# Altium PCB cs42448_breakout.PcbDoc
Units mil, origin at the board's own origin, x right, y up, seen from the top; angles counter-clockwise.
Board outline 2300 x 2400 mil, 2 copper layers (Top Layer, Bottom Layer); 69 components, 48 nets, 216 pads, 25 vias.
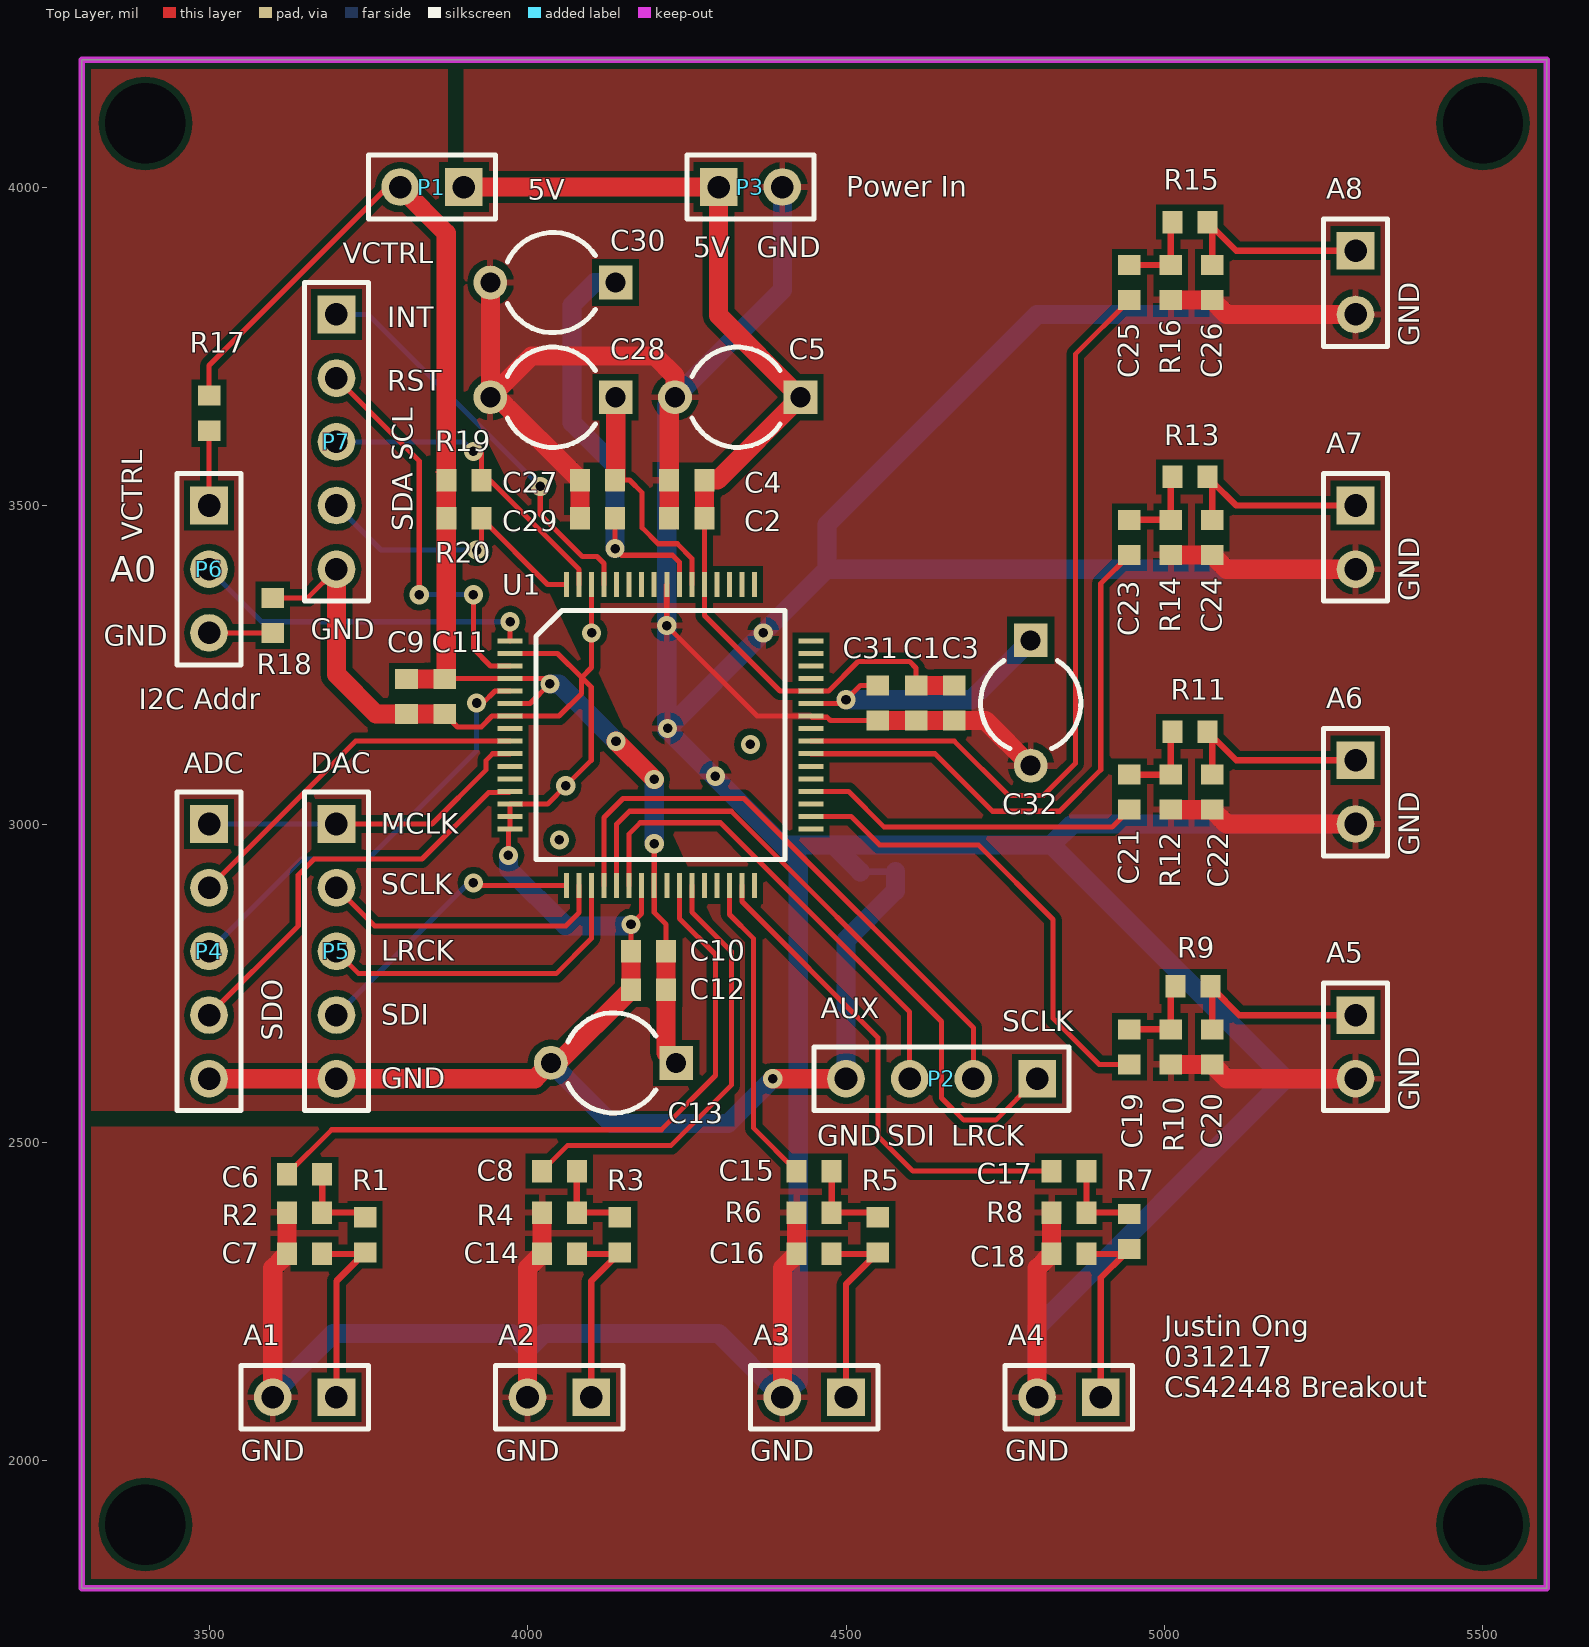
[diagram p0: Top Layer view]
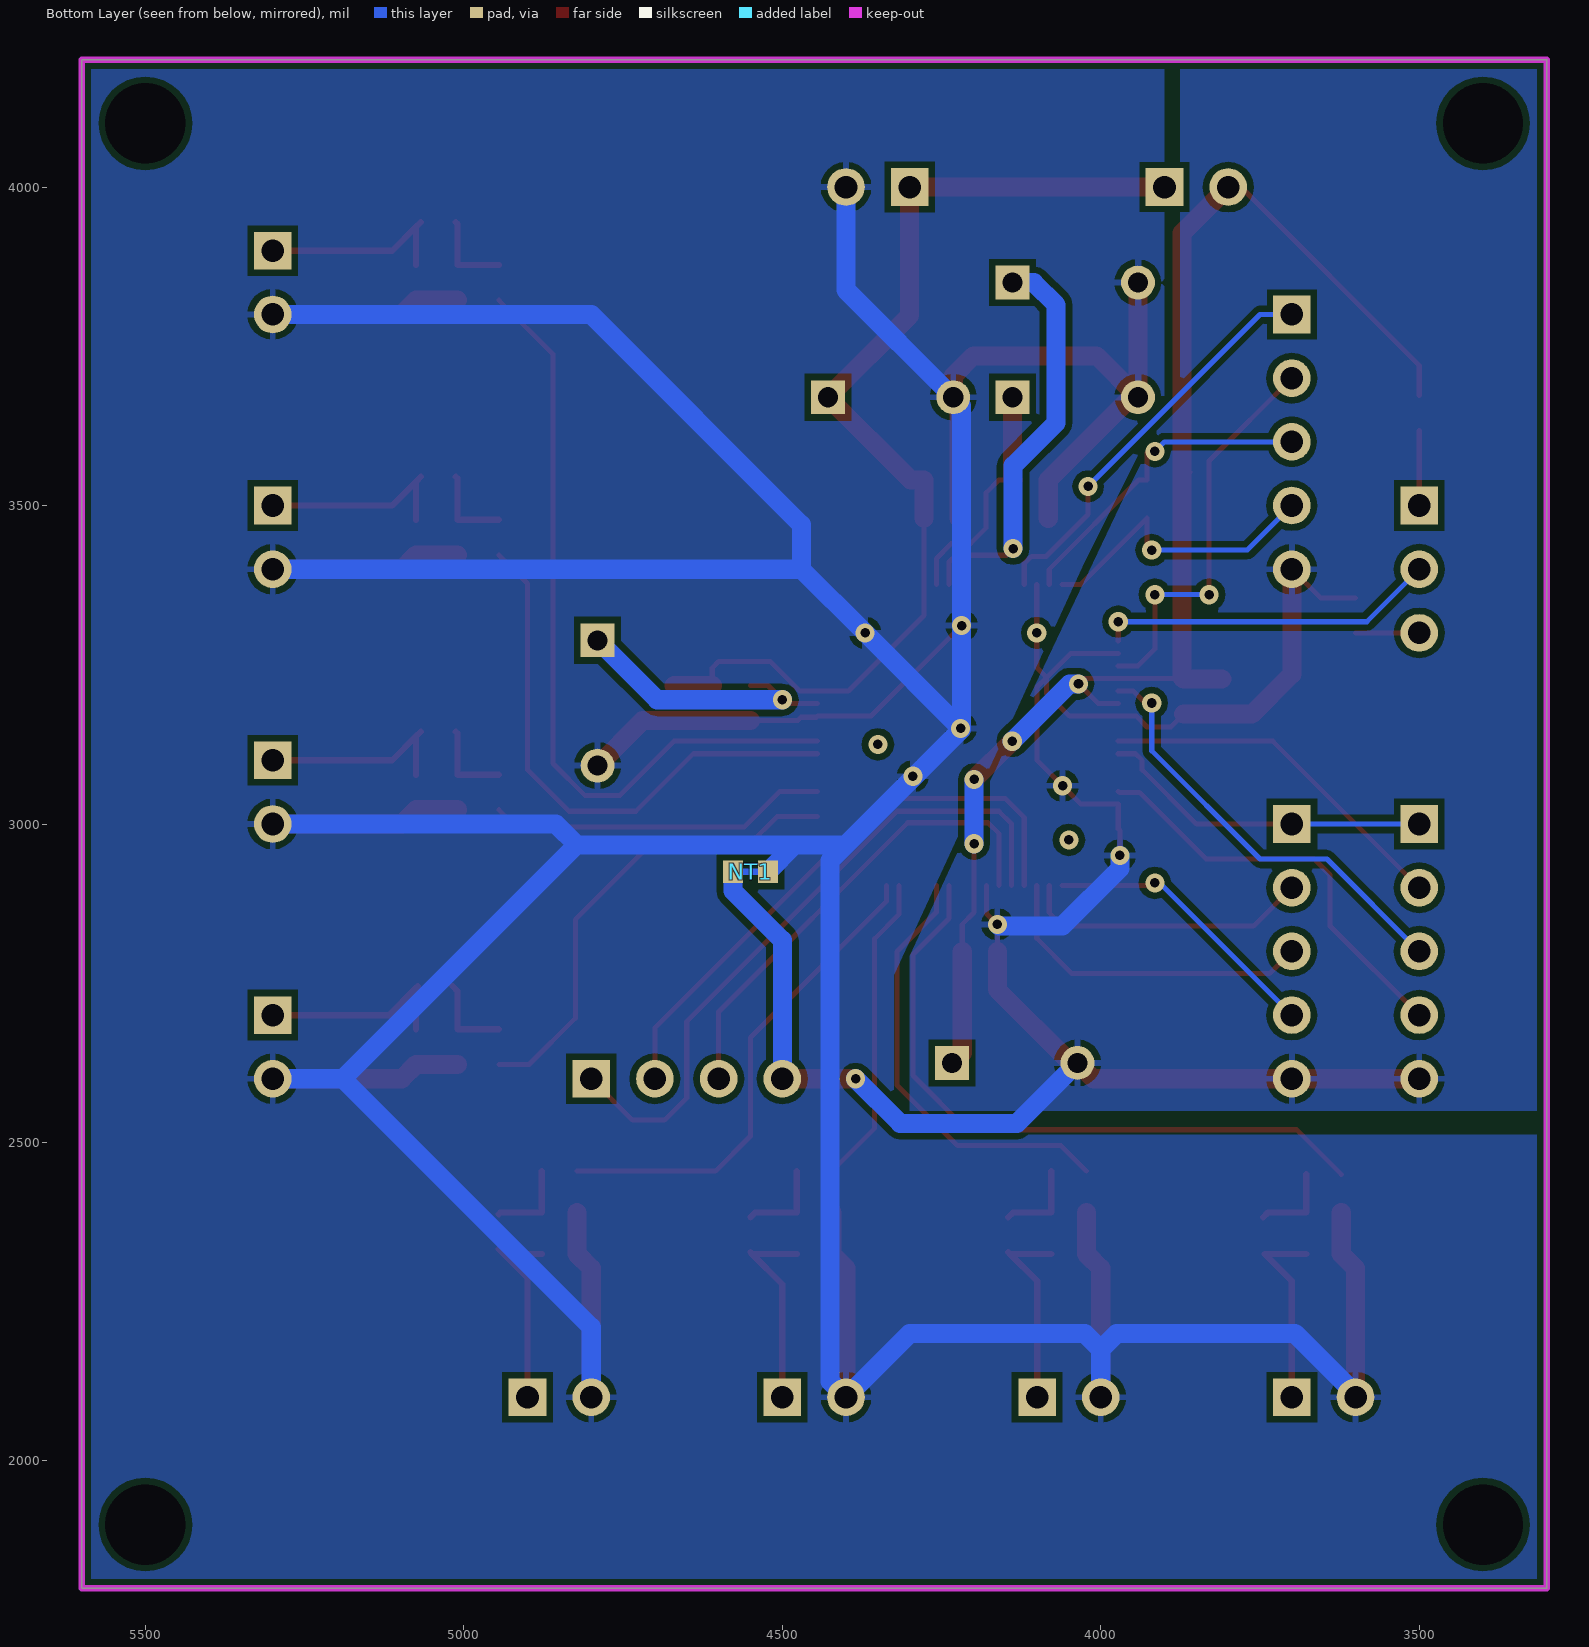
[diagram p1: Bottom Layer view, seen from below]

## Layer stack, top to bottom
Top Solder: solder mask 0.4, Solder Resist, Dk 3.5
Top Layer: signal copper 1.4
Dielectric 1: dielectric 12.6, FR-4, Dk 4.8
Bottom Layer: signal copper 1.4
Bottom Solder: solder mask 0.4, Solder Resist, Dk 3.5

## Board outline
3300,1800 3300,4200 5600,4200 5600,1800

## Design rules (kind name [scope] priority, off if disabled: settings)
Clearance [All] p1: gap=10
PolygonConnect [All] p1: connectstyle=Relief reliefconductorwidth=10 reliefentries=4 polygonreliefangle="90 Angle" airgapwidth=10
RoutingVias [All] p1: holewidth=20 width=20 viastyle="Through Hole" minholewidth=12 minwidth=20 maxholewidth=28 maxwidth=30
SolderMaskExpansion [All] p1: expansion=4
Width [All] p1: maxlimit=30 minlimit=6 preferedwidth=10
30 further rules are at their usual default settings.

## Components (designator, comment, footprint, x,y, rotation, side; value= is the part's Value field where it differs from the comment)
A1 "Header 2" HDR1X2 3700,2100 r180 top
A2 "Header 2" HDR1X2 4100,2100 r180 top
A3 "Header 2" HDR1X2 4500,2100 r180 top
A4 "Header 2" HDR1X2 4900,2100 r180 top
A5 "Header 2" HDR1X2 5300,2700 r270 top
A6 "Header 2" HDR1X2 5300,3100 r270 top
A7 "Header 2" HDR1X2 5300,3500 r270 top
A8 "Header 2" HDR1X2 5300,3900 r270 top
C1 "Cap" 1608[0603] 4610,3190 r90 top
C2 "Cap" 1608[0603] 4250,3480 r0 top
C3 "Cap" 1608[0603] 4670,3190 r90 top
C4 "Cap" 1608[0603] 4250,3540 r0 top
C5 "Cap Pol1" CAPR5-4X5 4330,3670 r180 top
C6 "Cap" 1608[0603] 3650,2450 r180 top
C7 "Cap" 1608[0603] 3650,2325 r0 top
C8 "Cap" 1608[0603] 4050,2455 r180 top
C9 "Cap" 1608[0603] 3810,3200 r90 top
C10 "Cap" 1608[0603] 4190,2800 r0 top
C11 "Cap" 1608[0603] 3870,3200 r90 top
C12 "Cap" 1608[0603] 4190,2740 r0 top
C13 "Cap Pol1" CAPR5-4X5 4135,2625 r180 top
C14 "Cap" 1608[0603] 4050,2325 r0 top
C15 "Cap" 1608[0603] 4450,2455 r180 top
C16 "Cap" 1608[0603] 4450,2325 r0 top
C17 "Cap" 1608[0603] 4850,2455 r180 top
C18 "Cap" 1608[0603] 4850,2325 r0 top
C19 "Cap" 1608[0603] 4945,2650 r270 top
C20 "Cap" 1608[0603] 5075,2650 r90 top
C21 "Cap" 1608[0603] 4945,3050 r270 top
C22 "Cap" 1608[0603] 5075,3050 r90 top
C23 "Cap" 1608[0603] 4945,3450 r270 top
C24 "Cap" 1608[0603] 5075,3450 r90 top
C25 "Cap" 1608[0603] 4945,3850 r270 top
C26 "Cap" 1608[0603] 5075,3850 r90 top
C27 "Cap" 1608[0603] 4110,3540 r0 top
C28 "Cap Pol1" CAPR5-4X5 4040,3670 r180 top
C29 "Cap" 1608[0603] 4110,3480 r0 top
C30 "Cap Pol1" CAPR5-4X5 4040,3850 r180 top
C31 "Cap" 1608[0603] 4550,3190 r90 top
C32 "Cap Pol1" CAPR5-4X5 4790,3190 r270 top
NT1 "Net Tie" "1608[0603] Net Tie" 4550,2925 r180 bottom net-tie
P1 "Control Voltage" HDR1X2 3900,4000 r180 top
P2 "AUX Bus" HDR1X4 4800,2600 r180 top
P3 "Power Input" HDR1X2 4300,4000 r0 top
P4 "ADC Bus" HDR1X5 3500,3000 r270 top
P5 "DAC Bus" HDR1X5 3700,3000 r270 top
P6 "I2C Address" HDR1X3 3500,3500 r270 top
P7 "Control Bus" HDR1X5 3700,3800 r270 top
R1 "Res2" 1608[0603] 3745,2355 r90 top
R2 "Res2" 1608[0603] 3650,2390 r180 top
R3 "Res2" 1608[0603] 4145,2355 r90 top
R4 "Res2" 1608[0603] 4050,2390 r180 top
R5 "Res2" 1608[0603] 4550,2355 r90 top
R6 "Res2" 1608[0603] 4450,2390 r180 top
R7 "Res2" 1608[0603] 4945,2360 r90 top
R8 "Res2" 1608[0603] 4850,2390 r180 top
R9 "Res2" 1608[0603] 5045,2745 r180 top
R10 "Res2" 1608[0603] 5010,2650 r270 top
R11 "Res2" 1608[0603] 5040,3145 r180 top
R12 "Res2" 1608[0603] 5010,3050 r270 top
R13 "Res2" 1608[0603] 5040,3545 r180 top
R14 "Res2" 1608[0603] 5010,3450 r270 top
R15 "Res2" 1608[0603] 5040,3945 r180 top
R16 "Res2" 1608[0603] 5010,3850 r270 top
R17 "Res2" 1608[0603] 3500,3645 r270 top
R18 "Res2" 1608[0603] 3600,3327.56 r90 top
R19 "Res2" 1608[0603] 3900,3540 r0 top
R20 "Res2" 1608[0603] 3900,3480 r0 top
U1 "CS42448" 64L-LQFP 3972.56,3287.48 r0 top locked

## Footprints (in the part's own frame and the unit in brackets; to place one, negate y for a bottom-side part, rotate by r counter-clockwise, add the part's x,y. Pads: shape width x height; smd on the part's side, far side on the other; paste and mask are expansions set on the pad)
64L-LQFP [mm]
  rect 1x0.2 smd: 1(0,0) 2(0,-0.5) 3(0,-1) 4(0,-1.5) 5(0,-2) 6(0,-2.5) 7(0,-3) 8(0,-3.5) 9(0,-4) 10(0,-4.5) 11(0,-5) 12(0,-5.5) 13(0,-6) 14(0,-6.5) 15(0,-7) 16(0,-7.5) 33(12,-7.5) 34(12,-7) 35(12,-6.5) 36(12,-6) 37(12,-5.5) 38(12,-5) 39(12,-4.5) 40(12,-4) 41(12,-3.5) 42(12,-3) 43(12,-2.5) 44(12,-2) 45(12,-1.5) 46(12,-1) 47(12,-0.5) 48(12,0)
  rect 0.2x1 smd: 17(2.25,-9.75) 18(2.75,-9.75) 19(3.25,-9.75) 20(3.75,-9.75) 21(4.25,-9.75) 22(4.75,-9.75) 23(5.25,-9.75) 24(5.75,-9.75) 25(6.25,-9.75) 26(6.75,-9.75) 27(7.25,-9.75) 28(7.75,-9.75) 29(8.25,-9.75) 30(8.75,-9.75) 31(9.25,-9.75) 32(9.75,-9.75) 49(9.75,2.25) 50(9.25,2.25) 51(8.75,2.25) 52(8.25,2.25) 53(7.75,2.25) 54(7.25,2.25) 55(6.75,2.25) 56(6.25,2.25) 57(5.75,2.25) 58(5.25,2.25) 59(4.75,2.25) 60(4.25,2.25) 61(3.75,2.25) 62(3.25,2.25) 63(2.75,2.25) 64(2.25,2.25)
  silkscreen extent 1.03,-8.71 10.96,1.22
1608[0603] [mm] "Chip Capacitor, Body 1.6x0.8mm, IPC High Density"
  rect 0.8x0.9 smd: 1(-0.7,0) 2(0.7,0)
  body extent -0.87,-0.48 0.87,0.48, height 1.3
"1608[0603] Net Tie" [mm] "Chip Capacitor, Body 1.6x0.8mm, IPC High Density"
  rect 0.8x0.9 smd: 1(-0.7,0) 2(0.7,0)
  Top Layer lines w0.254: 0.7,0 -0.7,0
  body extent -0.87,-0.48 0.87,0.48, height 1.3
CAPR5-4X5 [mm] "Capacitor; 2 Leads"
  rect 1.35x1.35 hole 0.8: 1(-2.5,0)
  round 1.35 hole 0.8: 2(2.5,0)
  silkscreen extent -1.69,-2 1.82,2
HDR1X2 [mm] "Connector; Header; 2 Position"
  rect 1.5x1.5 hole 0.9: 1(0,0)
  round 1.5 hole 0.9: 2(2.54,0)
  silkscreen extent -1.27,-1.27 3.81,1.27
HDR1X3 [mm] "Connector; Header; 3 Position"
  rect 1.5x1.5 hole 0.9: 1(0,0)
  round 1.5 hole 0.9: 2(2.54,0) 3(5.08,0)
  silkscreen extent -1.27,-1.27 6.35,1.27
HDR1X4 [mm] "Connector; Header; 4 Position"
  rect 1.5x1.5 hole 0.9: 1(0,0)
  round 1.5 hole 0.9: 2(2.54,0) 3(5.08,0) 4(7.62,0)
  silkscreen extent -1.27,-1.27 8.89,1.27
HDR1X5 [mm] "Connector; Header; 5 Position"
  rect 1.5x1.5 hole 0.9: 1(0,0)
  round 1.5 hole 0.9: 2(2.54,0) 3(5.08,0) 4(7.62,0) 5(10.16,0)
  silkscreen extent -1.27,-1.27 11.43,1.27

## Part data
A1 A2 A3 A4 A5 A6 A7 A8: "Header, 2-Pin"
C1 C2 C3 C4 C6 C7 C8 C9 C10 C11 C12 C14 C15 C16 C17 C18 C19 C20 C21 C22 C23 C24 C25 C26 C27 C29 C31: "Capacitor"
C5 C13 C28 C30 C32: "Polarized Capacitor (Radial)"
P1 P3: library part "Header 2", "Header, 2-Pin"
P2: library part "Header 4", "Header, 4-Pin"
P4 P5 P7: library part "Header 5", "Header, 5-Pin"
P6: library part "Header 3", "Header, 3-Pin"
R1 R2 R3 R4 R5 R6 R7 R8 R9 R10 R11 R12 R13 R14 R15 R16 R17 R18 R19 R20: "Resistor"
U1: "108 dB, 192 kHz 6-In, 8-Out CODEC"

## Free pads (board coordinates)
  round 0 hole 125.98: M1(3400,4100) M2(5500,4100) M3(5500,1900) M4(3400,1900)

## Via types
v1: diameter 30, hole 15, Top Layer to Bottom Layer, 25 vias

## Nets (pads, with @x,y where several pads share a name; then routed paths per layer and width w, separated by ;. In a path a pad name is that pad's centre, name@x,y a point inside that pad or via, vN(x,y) a via of type N, cw(c..) or ccw(c..) an arc to the next point about the centre after c; other vN are vias at no path point)
5V: C1.2 C2.2 C3.2 C4.2 C5.1 P1.1 P3.1 U1.44 U1.53 | length 1692.8
  Top Layer w8: C2.2 4277.56,3376.18 U1.53 4277.68,3327.32 4396.26,3208.74 U1.44 4472.73,3208.74 4518.99,3255 4600,3255 4610,3245 C1.2
  Top Layer w30: P1.1 P3.1 4300,3798.43 C5.1 4298.43,3540 C4.2 C2.2 ; C1.2 C3.2
ADC_LRCK: P4.3 U1.5 | length 686.2
  Top Layer w8: v1(3920,3190) 3920.44,3189.56 3929.64,3189.56 3948.82,3208.74 U1.5
  Bottom Layer w8: P4.3 3645,2945 3750,2945 3920,3115 v1(3920,3190)
ADC_SCLK: P4.2 U1.9 | length 567.8
  Top Layer w8: P4.2 3730,3130 U1.9
ADC_SDOUT1: P4.4 U1.13 | length 664.9
  Top Layer w8: P4.4 3640,2840 3640,2920 3665,2945 3834.36,2945 3938.94,3049.57 3970.87,3049.57 U1.13
AGND: A1.2 A2.2 A3.2 A4.2 A5.2 A6.2 A7.2 A8.2 C1.1 C2.1 C3.1 C4.1 C5.2 C7.1 C14.1 C16.1 C18.1 C20.1 C22.1 C24.1 C26.1 C27.1 C28.2 C29.1 C30.2 C31.1 C32.2 NT1.2 P3.2 R2.2 R4.2 R6.2 R8.2 R10.2 R12.2 R14.2 R16.2 U1.42 U1.56 | length 11652.3
  Top Layer w8: U1.56 v1(4218.62,3311.38) 4360.63,3169.37 U1.42 4446.75,3167.62 4470.48,3167.62 4475.66,3162.44 C31.1
  Top Layer w30: A1.2 3600,2302.56 C7.1 R2.2 ; C30.2 C28.2 ; A2.2 4000,2302.56 C14.1 R4.2 ; C29.1 C27.1 3952.44,3670 C28.2 ; C2.1 C4.1 4222.44,3660.87 C5.2 4231.57,3703.43 4200,3735 4006.57,3735 C28.2 ; A3.2 4400,2302.56 C16.1 R6.2 ; C31.1 C1.1 C3.1 4719.13,3162.44 C32.2 ; A4.2 4800,2302.56 C18.1 R8.2 ; R10.2 C20.1 5097.44,2600 A5.2 ; R12.2 C22.1 5097.44,3000 A6.2 ; R14.2 C24.1 5097.44,3400 A7.2 ; R16.2 C26.1 5097.44,3800 A8.2
  Bottom Layer w30: A1.2 3600,2105 3695,2200 3975,2200 4000,2175 ; A2.2 4000,2175 ; P3.2 4400,3838.43 C5.2 4218.62,3657.05 v1(4218.62,3311.38) v1@4218.62,3148.62 ; NT1.2 4480.2,2967.24 ; A4.2 4800,2210 5190,2600 ; A5.2 5190,2600 ; A6.2 4855.51,3000 4822.76,2967.24 ; A7.2 4470,3400 ; A8.2 4800,3800 4470,3470 4470,3400 ; 4000,2175 4025,2200 4300,2200 A3.2 4425,2125 4425,2942.24 4400,2967.24 ; v1@4218.62,3148.62 4400,2967.24 ; v1@4218.62,3148.62 v1(4220,3150) v1(4370,3300) 4470,3400 ; 4400,2967.24 4480.2,2967.24 ; 4480.2,2967.24 4822.76,2967.24 ; 4822.76,2967.24 5190,2600
  other v1: 4295,3075
AUX_LRCLK: P2.2 U1.20 | length 927.8
  Top Layer w8: U1.20 4120.2,3010.2 4150,3040 4340,3040 4700,2680 P2.2
AUX_SCLK: P2.1 U1.21 | length 1077.8
  Top Layer w8: U1.21 4139.88,2999.88 4160,3020 4320,3020 4650,2690 4650,2570 4685,2535 4735,2535 P2.1 P2.1@4785,2600
AUX_SDIN: P2.3 U1.22 | length 756.6
  Top Layer w8: U1.22 4159.57,2984.57 4177,3002 4303,3002 4600,2705 P2.3
DAC_LRCK: P5.3 U1.19 | length 521.1
  Top Layer w8: P5.3 3735,2765 4045,2765 4100.51,2820.51 U1.19
DAC_SCLK: P5.2 U1.18 | length 457.1
  Top Layer w8: P5.2 3760,2840 4060,2840 4080.83,2860.83 U1.18
DAC_SDIN1: P5.4 U1.17 | length 452.2
  Top Layer w8: v1(3915,2907.5) 3915,2910 3921.38,2903.62 U1.17
  Bottom Layer w8: P5.4 3907.5,2907.5 v1(3915,2907.5)
DGND: C9.1 C10.1 C11.1 C12.1 C13.2 NT1.1 P2.4 P4.5 P5.5 P7.5 R18.2 U1.2 U1.7 U1.14 U1.15 U1.16 U1.23 U1.62 | length 3435.4
  Top Layer w8: R18.2 3655.12,3355.12 P7.5 ; C11.1 3890,3152.44 3927.44,3152.44 3944.37,3169.37 U1.7 4049.37,3169.37 4085,3205 4085,3230 ; v1(3970,2950.81) 3970,2989.65 U1.16 U1.15 U1.14 4031.57,3031.57 v1(4060,3060) 4100,3100 4100,3215 4085,3230 ; U1.2 4047.2,3267.8 4085,3230 ; U1.62 v1(4100.51,3300) 4100.51,3245.51 4085,3230 ; C10.1 v1(4162.44,2842.44) 4179.25,2859.25 U1.23
  Top Layer w30: P4.5 P5.5 4011.57,2600 C13.2 4047.44,2625 C12.1 C10.1 ; P7.5 3700,3235 3762.56,3172.44 C9.1 C11.1 ; v1(4385,2600) P2.4
  Bottom Layer w8: v1@4160,2840 v1(4162.44,2842.44)
  Bottom Layer w30: v1(3970,2950.81) 3970,2930 4060,2840 v1@4160,2840 ; C13.2 4131.57,2530 4315,2530 v1(4385,2600) ; P2.4 4500,2817.44 4577.56,2895 NT1.1
INT: P7.1 U1.61 | length 640.7
  Top Layer w8: v1(4020,3530) 4020,3486.08 4086.08,3420 4108.99,3420 4120.2,3408.79 U1.61
  Bottom Layer w8: P7.1 3750,3800 v1(4020,3530)
MCLK: P4.1 P5.1 U1.10 | length 527
  Top Layer w8: P5.1 3850,3000 3935,3085 3935,3100 3945.32,3110.32 U1.10
  Bottom Layer w8: P4.1 P5.1
NetA1_1: A1.1 C7.2 R1.1 | length 307.6
  Top Layer w10: C7.2 3742.56,2325 3700,2282.44 A1.1
NetA2_1: A2.1 C14.2 R3.1 | length 311.1
  Top Layer w10: C14.2 R3.1@4142.56,2325 ; A2.1 4100,2282.44 R3.1@4142.56,2325 ; R3.1 R3.1@4142.56,2325
NetA3_1: A3.1 C16.2 R5.1 | length 318.2
  Top Layer w10: C16.2 R5.1@4547.56,2325 ; A3.1 4500,2277.44 R5.1@4547.56,2325 ; R5.1 R5.1@4547.56,2325
NetA4_1: A4.1 C18.2 R7.1 | length 311.1
  Top Layer w10: C18.2 R7.1@4937.56,2325 ; A4.1 4900,2287.44 R7.1@4937.56,2325 ; R7.1 R7.1@4937.56,2325
NetA5_1: A5.1 C20.2 R9.1 | length 311.1
  Top Layer w10: R9.1 R9.1@5075,2742.56 ; C20.2 R9.1@5075,2742.56 ; A5.1 5117.56,2700 R9.1@5075,2742.56
NetA6_1: A6.1 C22.2 R11.1 | length 311.1
  Top Layer w10: R11.1 R11.1@5075,3137.56 ; C22.2 R11.1@5075,3137.56 ; A6.1 5112.56,3100 R11.1@5075,3137.56
NetA7_1: A7.1 C24.2 R13.1 | length 311.1
  Top Layer w10: R13.1 R13.1@5075,3537.56 ; C24.2 R13.1@5075,3537.56 ; A7.1 5112.56,3500 R13.1@5075,3537.56
NetA8_1: A8.1 C26.2 R15.1 | length 311.1
  Top Layer w10: R15.1 R15.1@5075,3937.56 ; C26.2 R15.1@5075,3937.56 ; A8.1 5112.56,3900 R15.1@5075,3937.56
NetC6_1: C6.1 R1.2 R2.1 | length 130.5
  Top Layer w10: C6.1 R2.1 3737.56,2390 R1.2
NetC6_2: C6.2 U1.26 | length 1058.9
  Top Layer w8: C6.2 3692.44,2520 4210,2520 4295,2605 4295,2795 4238.31,2851.69 U1.26
NetC8_1: C8.1 R3.2 R4.1 | length 135.5
  Top Layer w10: C8.1 R4.1 4137.56,2390 R3.2
NetC8_2: C8.2 U1.27 | length 692.8
  Top Layer w8: C8.2 4062.44,2495 4225,2495 4320,2590 4320,2800 4257.99,2862.01 U1.27
NetC15_1: C15.1 R5.2 R6.1 | length 140.5
  Top Layer w10: C15.1 R6.1 4542.56,2390 R5.2
NetC15_2: C15.2 U1.30 | length 492.3
  Top Layer w8: U1.30 4317.05,2857.95 4355,2820 4355,2522.44 C15.2
NetC17_1: C17.1 R7.2 R8.1 | length 133.5
  Top Layer w10: C17.1 R8.1 4942.56,2390 R7.2
NetC17_2: C17.2 U1.31 | length 777.2
  Top Layer w8: U1.31 4336.73,2878.27 4550,2665 4550,2510 4605,2455 C17.2
NetC19_1: C19.1 R9.2 R10.1 | length 135.5
  Top Layer w10: C19.1 R10.1 5010,2737.56 R9.2
NetC19_2: C19.2 U1.34 | length 752.1
  Top Layer w8: U1.34 4508.11,3011.89 4552.76,2967.24 4707.76,2967.24 4825,2850 4825,2695 4897.56,2622.44 C19.2
NetC21_1: C21.1 R11.2 R12.1 | length 133.5
  Top Layer w10: C21.1 R12.1 5010,3142.56 R11.2
NetC21_2: C21.2 U1.36 | length 534.7
  Top Layer w8: U1.36 4503.74,3051.26 4560,2995 4917.56,2995 C21.2
NetC23_1: C23.1 R13.2 R14.1 | length 133.5
  Top Layer w10: C23.1 R14.1 5010,3542.56 R13.2
NetC23_2: C23.2 U1.39 | length 875.4
  Top Layer w8: U1.39 4639.69,3110.32 4730,3020 4835,3020 4900,3085 4900,3377.44 C23.2
NetC25_1: C25.1 R15.2 R16.1 | length 133.5
  Top Layer w10: C25.1 R16.1 5010,3942.56 R15.2
NetC25_2: C25.2 U1.40 | length 1233.6
  Top Layer w8: U1.40 4670,3130 4755,3045 4810,3045 4860,3095 4860,3737.44 C25.2
NetC27_2: C27.2 C28.1 U1.54 | length 374.9
  Top Layer w8: C27.2 4160,3540 4180,3520 4180,3465 4205,3440 4235,3440 4257.99,3417.01 U1.54
  Top Layer w30: C27.2 4138.43,3540.87 C28.1
NetC29_2: C29.2 C30.1 U1.55 | length 685.7
  Top Layer w8: C29.2 v1(4137.56,3432.44) 4148,3422 4227.54,3422 4238.31,3411.24 U1.55
  Bottom Layer w30: v1(4137.56,3432.44) 4137.56,3562.44 4070,3630 4070,3815 4105,3850 C30.1
NetC31_2: C31.2 C32.1 U1.43 | length 445.5
  Top Layer w8: U1.43 4494.06,3189.05 v1(4500,3195) 4522.56,3217.56 C31.2
  Bottom Layer w30: v1(4500,3195) 4696.57,3195 C32.1
NetP6_1: P6.1 R17.2 | length 117.4
  Top Layer w8: P6.1 R17.2
NetP6_2: P6.2 U1.1 | length 536.8
  Top Layer w8: U1.1 v1(3972.56,3317.56)
  Bottom Layer w8: P6.2 3582.44,3317.56 v1(3972.56,3317.56)
NetP6_3: P6.3 R18.1 | length 100
  Top Layer w8: P6.3 R18.1
R\S\T\: P7.2 U1.3 | length 632.5
  Top Layer w8: P7.2 3830,3570 v1(3830,3360) ; v1(3915,3360) 3915,3275 3941.89,3248.11 U1.3
  Bottom Layer w8: v1(3830,3360) v1(3915,3360)
SCL: P7.3 R19.2 U1.63 | length 512.4
  Top Layer w8: v1(3915,3585) 3925,3585 3927.56,3582.44 R19.2 3940.63,3540 4080.83,3399.8 U1.63
  Bottom Layer w8: P7.3 3900,3600 v1(3915,3585)
SDA: P7.4 R20.2 U1.64 | length 478.8
  Top Layer w8: v1(3920,3430) 3927.56,3437.56 R20.2 4031.5,3376.06 U1.64
  Bottom Layer w8: P7.4 3770,3430 v1(3920,3430)
VCTRL: C9.2 C10.2 C11.2 C12.2 C13.1 P1.2 R17.1 R19.1 R20.1 U1.4 U1.6 U1.24 | length 2272.9
  Top Layer w8: R17.1 3500,3720 3780,4000 P1.2 ; R19.1@3859.88,3552.56 R19.1 ; C11.2@3870.87,3228.43 U1.4 4026.57,3228.43 v1(4035,3220) 4004.05,3189.05 U1.6 ; v1(4198.94,2968.94) U1.24 4198.94,2861.06 4217.56,2842.44 C10.2
  Top Layer w30: P1.2 3872.44,3927.56 R19.1 R20.1 3872.44,3230 3870.87,3228.43 C11.2 C9.2 ; v1(4138.94,3130) v1(4198.94,3070) ; C10.2 C12.2 4217.56,2640.87 C13.1
  Bottom Layer w30: v1(4035,3220) 4048.94,3220 v1(4138.94,3130) ; v1(4198.94,2968.94) v1(4198.94,3070)
pads on no net: U1.8 U1.11 U1.12 U1.25 U1.28 U1.29 U1.32 U1.33 U1.35 U1.37 U1.38 U1.41 U1.45 U1.46 U1.47 U1.48 U1.49 U1.50 U1.51 U1.52 U1.57 U1.58 U1.59 U1.60
copper on no net:
  other v1: 4050,2975 4350,3125

## Polygon pours and split planes (outlines as drawn)
AGND on Top Layer "Top AGND" (solid, pour order 2): 3300,1800 5600,1800 5600,4200 3900,4200 3900,3675 4025,3425 4325,2775 4325,2525 3300,2525
no net on Top Layer "Top DGND" (solid, pour order 10): 3300,2550 4300,2550 4300,2800 3875,3700 3875,4200 3300,4200 3300,2525
AGND on Bottom Layer "Bottom AGND" (solid, pour order 4): 3300,1787.5 5600,1787.5 5600,4187.5 3900,4187.5 3900,3662.5 4025,3412.5 4325,2762.5 4325,2512.5 3300,2512.5
DGND on Bottom Layer "Bottom DGND" (solid, pour order 6): 3300,2550 4300,2550 4300,2800 3875,3700 3875,4200 3300,4200 3300,2525

## Keep-outs
Keep-Out Layer:
  the board outline again, w10

## Silkscreen, mask and mechanical layers (free items; w line width, h text height)
Top Overlay:
  text "Power In" at 4500,3985 h32
  text "5V" at 4000,3980 h32
  text "5V" at 4260,3890 h32
  text "GND" at 4360,3890 h32
  text "VCTRL" at 3710,3880 h32
  text "INT" at 3780,3780 h32
  text "GND" at 5400,3750 h32 r90
  text "RST" at 3780,3680 h32
  text "SCL" at 3820,3570 h32 r90
  text "SDA" at 3820,3460 h32 r90
  text "VCTRL" at 3395,3445 h32 r90
  text "A0" at 3345,3380 h40
  text "GND" at 5400,3350 h32 r90
  text "GND" at 3660,3290 h32
  text "GND" at 3335,3280 h32
  text "I2C Addr" at 3390,3180 h32
  text "ADC" at 3460,3080 h32
  text "DAC" at 3660,3080 h32
  text "MCLK" at 3770,2985 h32
  text "GND" at 5400,2950 h32 r90
  text "SCLK" at 3770,2890 h32
  text "LRCK" at 3770,2785 h32
  text "AUX" at 4460,2695 h32
  text "SDI" at 3770,2685 h32
  text "SCLK" at 4745,2675 h32
  text "SDO" at 3615,2660 h32 r90
  text "GND" at 3770,2585 h32
  text "GND" at 5400,2550 h32 r90
  text "GND" at 4455,2495 h32
  text "SDI" at 4565,2495 h32
  text "LRCK" at 4665,2495 h32
  text "Justin Ong / 031217 / CS42448 Breakout" at 5000,2100 h32
  text "GND" at 3550,2000 h32
  text "GND" at 3950,2000 h32
  text "GND" at 4350,2000 h32
  text "GND" at 4750,2000 h32